# EAGLE board wemos_envir (EAGLE 7.7.0)
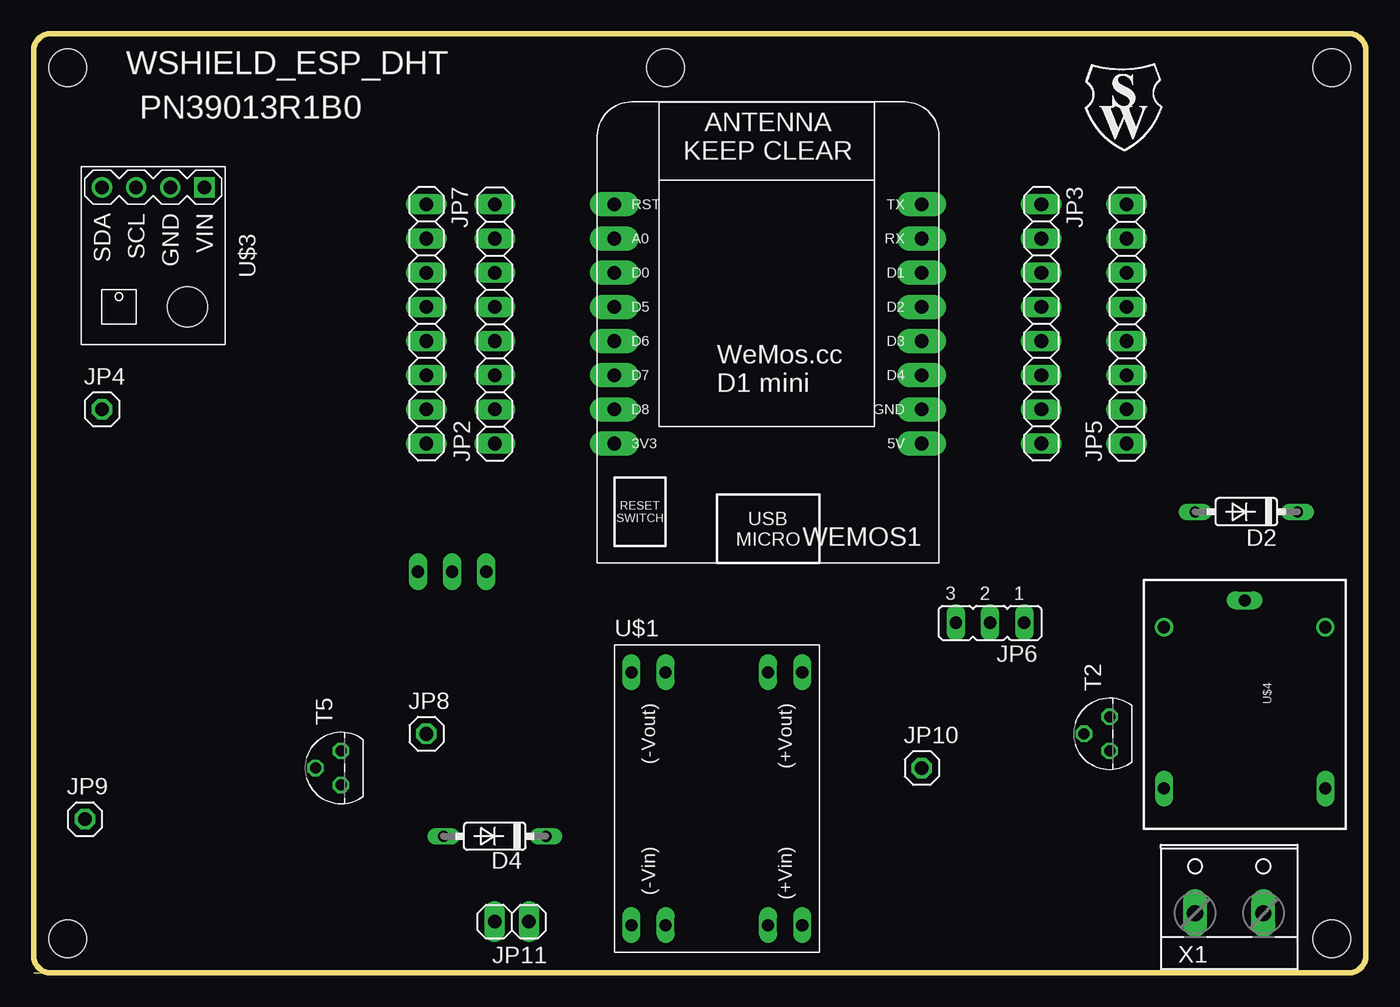
[diagram p0: board, top side]
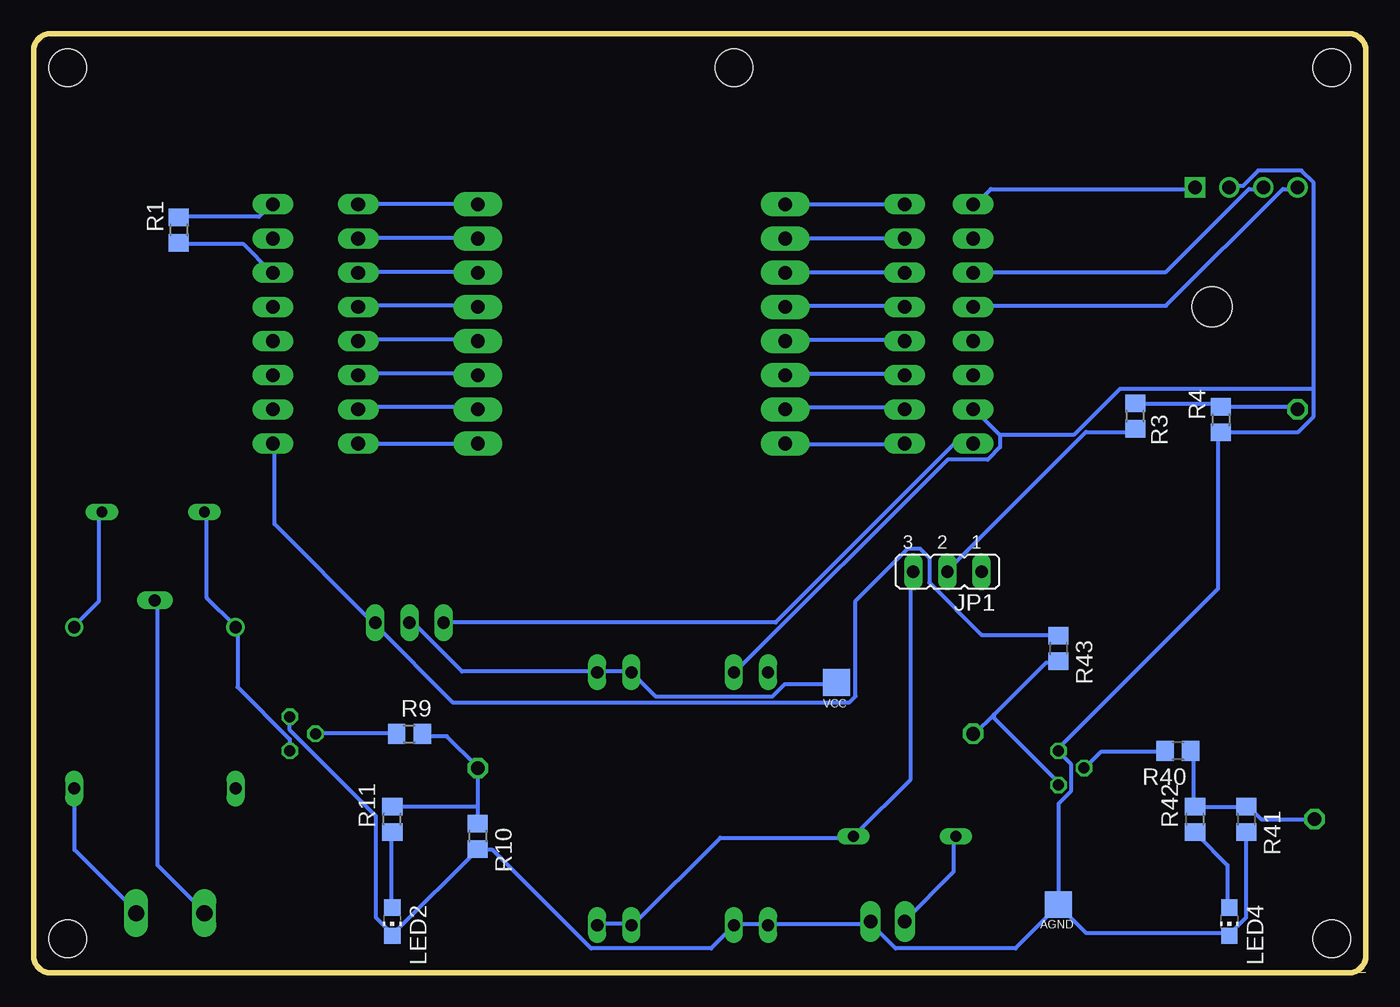
[diagram p1: board, bottom side, seen from below]

Size 99.06 x 69.85 mm. Coordinates in mm from the lower left corner, seen from the top.
Outline: 0,0 2.03,0
Outline: 28.45,0 31.42,0
Outline: 0,1.27 0,68.58 arc-90 1.27,69.85 97.79,69.85 arc-90 99.06,68.58 99.06,1.27 arc-90 97.79,0 1.27,0 arc-90 0,1.27
Copper layers (1*16): Top 0.035mm / dielectric 1.6mm / Bottom 0.035mm
Design rules "Elecrow_2-layer_PCB_eagle_rule *": minimum track width 12mil, minimum drill 12mil, track to track 6mil, track to pad 6mil, pad to pad 6mil, via to via 8mil, smd to smd 0mil, copper to edge 20mil, drill to drill 10mil, minimum pad ring 6mil, minimum via ring 6mil, stop-mask expansion 0mil, vias tented up to drill 100mil, thermal gap 10mil
Holes 2.8 mm at 2.54,67.31 46.99,67.31 2.54,2.54 96.52,67.31 96.52,2.54

## Footprints (pad centres in the part's own frame; a part is rotated, then mirrored left to right if it is on the bottom)
TP20SQ = smd 2 x 2: TP 0,0
DO35-7 = drill 0.813 long: A 3.81,0; C -3.81,0
JP2 = drill 0.914 long: 1 -2.54,0; 2 0,0; 3 2.54,0
1X08 = drill 1.016 long: 1 -8.89,0; 2 -6.35,0; 3 -3.81,0; 4 -1.27,0; 5 1.27,0; 6 3.81,0; 7 6.35,0; 8 8.89,0
1X01 = drill 1.016 octagon: 1 0,0
1X02 = drill 1.016 long: 1 -1.27,0; 2 1.27,0
CHIP-LED0805 = smd 1.2 x 1.2: A 0,-1.05; C 0,1.05
R0805 = smd 1.3 x 1.5: 1 -0.95,0; 2 0.95,0
TO92 = drill 0.813 octagon: 1 1.27,0; 2 0,1.905; 3 -1.27,0
LVPS = drill 0.9 long: 1 -6.35,9.4; 2 -3.81,9.4; 3 3.81,9.4; 4 6.35,9.4; 5 -6.35,-9.4; 6 -3.81,-9.4; 7 3.81,-9.4; 8 6.35,-9.4
TEMP-HUM-PRES-BME280 = drill 1 square: 1 -5.08,3.81 | drill 1: 2 -5.08,1.27; 3 -5.08,-1.27; 4 -5.08,-3.81 | hole 3: 3.81,2.54
SRD-05VDC-SL-C = drill 0.9: COIL0 -5.39,-6.12; COIL1 -5.39,5.88 | drill 0.9 long: SWCLOSED 6.61,-6.12; SWCOMMON -7.39,-0.12; SWOPEN 6.61,5.88
WEMOS-D1-MINI = drill 1.016 pad 1.829 long: 3V3 -10.16,-10.16; 5V 12.7,-10.16; A0 -10.16,5.08; D0 -10.16,2.54; D1 12.7,2.54; D2 12.7,0; D3 12.7,-2.54; D4 12.7,-5.08; D5 -10.16,0; D6 -10.16,-2.54; D7 -10.16,-5.08; D8 -10.16,-7.62; GND 12.7,-7.62; RESET -10.16,7.62; RX 12.7,5.08; TX 12.7,7.62
W237-132 = drill 1.194 long: 1 -2.54,-0.635; 2 2.54,-0.635

## Placement (x,y rotation side)
AGND  TPSQTP20SQ  [TP20SQ]  22.86,5.08 270 bottom
D2  1N4148DO35-7  [DO35-7]  90.17,34.29 180 top
D4  1N4148DO35-7  [DO35-7]  34.29,10.16 180 top
JP1  [JP2]  31.11,29.84 180 bottom
JP2  [1X08]  34.29,48.26 90 top
JP3  [1X08]  74.93,48.26 270 top
JP4  [1X01]  5.08,41.91 0 top
JP5  [1X08]  81.28,48.26 90 top
JP6  [JP2]  71.12,26.04 180 top
JP7  [1X08]  29.21,48.26 270 top
JP8  [1X01]  29.21,17.78 0 top
JP9  [1X01]  3.81,11.43 0 top
JP10  [1X01]  66.04,15.24 0 top
JP11  [1X02]  35.56,3.81 180 top
LED2  [CHIP-LED0805]  72.39,3.81 180 bottom
LED4  [CHIP-LED0805]  10.16,3.81 180 bottom
R1  470Ohm  [R0805]  88.27,55.24 270 bottom
R3  [R0805]  17.14,41.4 90 bottom
R4  [R0805]  10.79,41.15 270 bottom
R9  [R0805]  71.12,17.78 0 bottom
R10  [R0805]  66.04,10.16 270 bottom
R11  [R0805]  72.39,11.43 90 bottom
R40  [R0805]  13.97,16.51 180 bottom
R41  [R0805]  8.89,11.43 270 bottom
R42  [R0805]  12.7,11.43 90 bottom
R43  [R0805]  22.86,24.13 270 bottom
T2  BC547  [TO92]  80.01,17.78 90 top
T5  BC547  [TO92]  22.86,15.24 90 top
U$1  [LVPS]  50.8,12.95 0 top
U$2  [BRAND_SWI_5X7]  77.98,60.96 0 top
U$3  TEMP-HUM-PRES-BME280  [TEMP-HUM-PRES-BME280]  8.89,53.34 270 top
U$4  RELAYPTH  [SRD-05VDC-SL-C]  90.17,20.32 270 top
VCC  TPSQTP20SQ  [TP20SQ]  39.37,21.59 270 bottom
WEMOS1  [WEMOS-D1-MINI]  53.34,49.53 0 top
X1  [W237-132]  88.9,5.08 0 top

## Library data of the parts
AGND VCC = testpad
D2 D4 = diode
JP1 JP6 = jumper
JP2-JP5 JP7-JP11 = pinhead
LED2 LED4 = led
R1 R3 R4 R9-R11 R40-R43 = rcl
T2 T5 = transistor
U$1 U$4 WEMOS1 = SWI_COMMONS
U$2 = BRAND_SWI
U$3 = diy-modules
X1 = con-wago-508; OC_FARNELL: unknown; OC_NEWARK: unknown

## Nets
+3V3: JP5.1 JP6.1 R43.1
+5V: JP6.3 JP7.8
+9V: D4.C JP1.3 U$1.7 U$1.8
ADCIN: JP4.1 R3.2 R4.1
AGND: AGND.TP JP7.7 JP11.1 LED2.C LED4.C R4.2 R10.2 R41.2 T2.1 T5.1 U$1.2 U$1.5 U$1.6 U$3.2
EXTADCIN: JP1.1
N$1: JP1.2 R3.1
N$2: JP5.6 R1.2
N$3: D2.C U$4.COIL1
N$4: D2.A T2.3 U$4.COIL0
N$5: R9.1 T2.2
N$6: JP10.1 R9.2 R10.1 R11.2
N$7: LED2.A R11.1
N$8: U$4.SWOPEN X1.2
N$9: U$4.SWCOMMON X1.1
N$10: JP5.8 R1.1
N$11: JP2.7 WEMOS1.A0
N$12: JP2.8 WEMOS1.RESET
N$13: JP2.6 WEMOS1.D0
N$14: JP2.5 WEMOS1.D5
N$15: JP2.4 WEMOS1.D6
N$16: JP2.3 WEMOS1.D7
N$17: JP2.2 WEMOS1.D8
N$18: JP2.1 WEMOS1.3V3
N$19: JP3.3 WEMOS1.D1
N$20: JP3.4 WEMOS1.D2
N$21: JP3.1 WEMOS1.TX
N$22: JP3.2 WEMOS1.RX
N$23: JP3.6 WEMOS1.D4
N$24: JP3.7 WEMOS1.GND
N$25: JP3.8 WEMOS1.5V
N$26: JP3.5 WEMOS1.D3
N$27: R40.2 T5.2
N$28: JP7.1 U$3.1
N$31: LED4.A R42.1
PCTRL: JP9.1 R40.1 R41.1 R42.2
PVIN: JP8.1 R43.2 T5.3
SCA: JP7.4 U$3.4
SCL: JP7.3 U$3.3
V+: D4.A JP11.2
VCC: JP6.2 U$1.3 U$1.4 VCC.TP

## Tracks (layer width: path | path; a pad name or v marks a point on that pad's centre or on a via)
+3V3
  Bottom 0.305: R43.1 22.86,25.15 28.57,25.15 32.46,29.03 32.46,30.86 33.15,31.55 34.06,31.55 37.95,27.66 37.95,20.57 38.41,20.12 67.89,20.12 73.61,25.83 JP6.1 73.84,26.06 81.15,33.38 81.15,39.32 JP5.1
+5V
  Bottom 0.305: JP6.3 68.58,26.06 43.89,26.06 30.63,39.32 29.26,39.32 JP7.8
+9V
  Bottom 0.305: U$1.8 57.15,3.66 54.63,3.66 U$1.7 54.41,3.66 48.01,10.06 38.18,10.06 D4.C 37.95,10.29 33.83,14.4 33.83,29.72 JP1.3
ADCIN
  Bottom 0.305: JP4.1 5.26,42.06 10.74,42.06 R4.1 10.97,42.29 17.14,42.29 R3.2
AGND
  Bottom 0.305: 27.2,40.01 27.2,39.09 28.12,38.18 31.09,38.18 46.86,22.4 U$1.2 | 27.2,40.01 29.03,41.83 JP7.7 | T2.1 80.01,18.06 73.61,11.66 73.61,4.12 72.47,2.97 LED2.C 72.24,2.97 66.06,9.14 R10.2 65.84,9.14 64.92,9.14 57.61,1.83 48.69,1.83 47.09,3.43 U$1.6 46.86,3.66 44.58,3.66 U$1.5 44.35,3.66 37.03,3.66 JP11.1 36.8,3.66 34.98,1.83 26.06,1.83 22.86,5.03 | R41.2 8.91,10.29 8.91,4.12 10.06,2.97 LED4.C 10.29,2.97 20.8,2.97 22.86,5.03 | 3.89,43.43 3.89,41.38 5.03,40.23 10.74,40.23 R4.2 10.97,40.01 10.97,28.57 22.86,16.69 T5.1 22.86,16.46 21.95,15.54 21.95,13.49 22.86,12.57 AGND.TP 22.86,5.03 | 3.89,43.43 3.89,58.75 4.8,59.66 8,59.66 9.14,58.52 10.06,58.52 U$3.2 | 27.2,40.01 21.72,40.01 18.29,43.43 3.89,43.43
N$1
  Bottom 0.305: R3.1 17.14,40.23 20.8,40.23 31.09,29.95 JP1.2
N$2
  Bottom 0.305: R1.2 88.24,54.18 83.44,54.18 81.38,52.12 JP5.6
N$3
  Bottom 0.305: D2.C 94.18,34.29 94.18,27.66 96.01,25.83 U$4.COIL1
N$4
  Bottom 0.305: T2.3 80.01,17.37 83.9,21.26 83.9,25.6 U$4.COIL0 84.12,25.83 86.18,27.89 86.18,34.29 D2.A
N$5
  Bottom 0.305: R9.1 72.24,17.83 77.95,17.83 T2.2
N$6
  Bottom 0.305: 66.06,12.34 66.06,15.09 JP10.1 66.06,15.32 68.35,17.6 69.95,17.6 R9.2 | 66.06,12.34 66.06,11.2 R10.1 | 66.06,12.34 72.24,12.34 R11.2
N$7
  Bottom 0.305: LED2.A 72.47,5.03 72.47,10.29 R11.1
N$8
  Bottom 0.305: U$4.SWOPEN 96.01,13.49 96.01,9.14 91.44,4.57 X1.2
N$9
  Bottom 0.305: U$4.SWCOMMON 89.84,27.66 89.84,8 86.41,4.57 X1.1
N$10
  Bottom 0.305: R1.1 88.24,56.24 82.3,56.24 81.38,57.15 JP5.8
N$11
  Bottom 0.305: JP2.7 34.29,54.63 42.98,54.63 WEMOS1.A0
N$12
  Bottom 0.305: WEMOS1.RESET JP2.8
N$13
  Bottom 0.305: JP2.6 34.29,52.12 42.98,52.12 WEMOS1.D0
N$14
  Bottom 0.305: JP2.5 34.29,49.61 42.98,49.61 WEMOS1.D5
N$15
  Bottom 0.305: JP2.4 34.29,47.09 42.98,47.09 WEMOS1.D6
N$16
  Bottom 0.305: JP2.3 34.29,44.58 42.98,44.58 WEMOS1.D7
N$17
  Bottom 0.305: JP2.2 34.29,42.06 42.98,42.06 WEMOS1.D8
N$18
  Bottom 0.305: JP2.1 34.29,39.32 42.98,39.32 WEMOS1.3V3
N$19
  Bottom 0.305: JP3.3 74.75,52.12 66.06,52.12 WEMOS1.D1
N$20
  Bottom 0.305: JP3.4 74.75,49.61 66.06,49.61 WEMOS1.D2
N$21
  Bottom 0.305: WEMOS1.TX JP3.1
N$22
  Bottom 0.305: JP3.2 74.75,54.63 66.06,54.63 WEMOS1.RX
N$23
  Bottom 0.305: JP3.6 74.75,44.58 66.06,44.58 WEMOS1.D4
N$24
  Bottom 0.305: JP3.7 74.75,42.06 66.06,42.06 WEMOS1.GND
N$25
  Bottom 0.305: JP3.8 74.75,39.32 66.06,39.32 WEMOS1.5V
N$26
  Bottom 0.305: JP3.5 74.75,47.09 66.06,47.09 WEMOS1.D3
N$27
  Bottom 0.305: R40.2 15.09,16.46 19.66,16.46 20.8,15.32 T5.2
N$28
  Bottom 0.305: U$3.1 12.8,58.29 27.89,58.29 29.03,57.15 JP7.1
N$31
  Bottom 0.305: LED4.A 10.29,5.03 10.29,8 12.57,10.29 R42.1
PCTRL
  Bottom 0.305: R40.1 12.8,16.46 12.8,12.57 R42.2 12.57,12.34 8.91,12.34 R41.1 8.69,12.34 7.77,11.43 JP9.1
PVIN
  Bottom 0.305: 27.66,19.2 29.03,17.83 JP8.1 | 27.66,19.2 23.77,23.09 22.86,23.09 R43.2 | 27.66,19.2 27.66,18.97 22.86,14.17 T5.3
SCA
  Bottom 0.305: U$3.4 5.26,58.29 6.17,58.29 14.86,49.61 29.03,49.61 JP7.4
SCL
  Bottom 0.305: U$3.3 7.77,58.29 8.69,58.29 14.86,52.12 29.03,52.12 JP7.3
V+
  Bottom 0.305: D4.A 30.63,10.06 30.63,7.54 34.29,3.89 JP11.2
VCC
  Bottom 0.305: VCC.TP 39.55,21.49 43.2,21.49 44.12,20.57 52.81,20.57 54.41,22.17 U$1.3 54.63,22.4 57.15,22.4 | 57.15,22.4 67.21,22.4 70.64,25.83 71.09,25.83 JP6.2 | 57.15,22.4 U$1.4

## Text on the board
tNames: WSHIELD_ESP_DHT | PN39013R1B0